# Altium PCB MODULIQ_RF_Detector.PcbDoc (part 2 of 2)
Units mm, origin at the board's own origin, x right, y up, seen from the top; angles counter-clockwise.
Board outline 24 x 76.5 mm, 4 copper layers (L1, P2, L3, L4), stack 1.512 mm thick; 99 components, 100 nets, 366 pads, 199 vias.
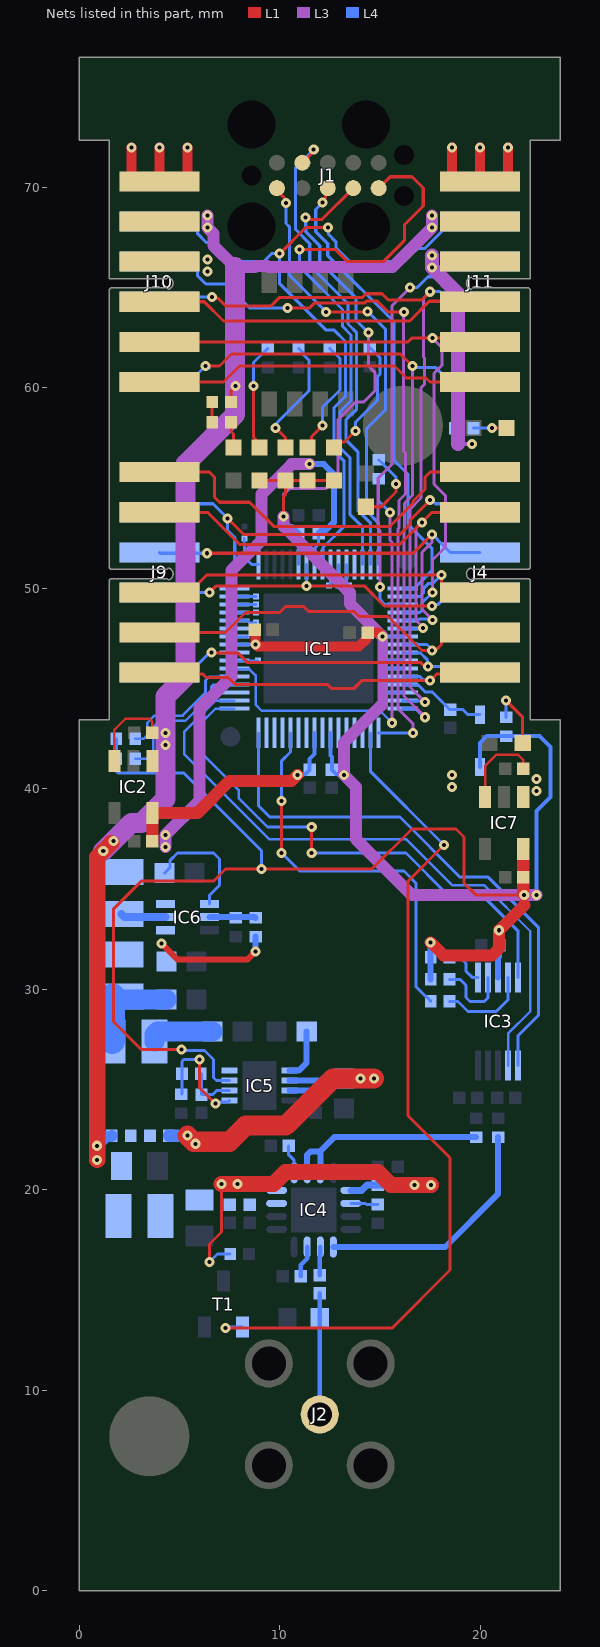
[diagram p4: the nets of this part, all layers, seen from the top]

## Via types
v1: diameter 0.5, hole 0.2, L1 to L4, tented both sides, 188 vias
v2: diameter 0.5, hole 0.2, L1 to L4, 11 vias

## Nets (pads, with @x,y where several pads share a name; then routed paths per layer and width w, separated by ;. In a path a pad name is that pad's centre, name@x,y a point inside that pad or via, vN(x,y) a via of type N, cw(c..) or ccw(c..) an arc to the next point about the centre after c; other vN are vias at no path point) (continued)
HSPI_AD0: IC1.22 J4.8 J9.8 | length 23.9
  L1 w0.15: J9.8@4,53.8 6.4,53.8 8,52.2 16,52.2 17.6,53.8 J4.8@20,53.8
  L3 w0.15: v1(17.1,53.3) 16.8,53 16.8,48.409 17.155,48.054 v1(17.155,48.018)
  L4 w0.15: IC1.22@16.14,48 16.149,48.009 17.146,48.009 v1(17.155,48.018)
HSPI_AD1: IC1.18 J4.10 J9.10 | length 19.5
  L1 w0.152: J9.10@4,49.8 5.5,49.8 6.377,50.677 v1(18.076,50.677) ; v1@18.075,50.65 18.076,50.649 18.076,50.224 18.5,49.8 J4.10@20,49.8
  L4 w0.152: IC1.18@16.14,49.6 16.998,49.6 17.17,49.772 17.17,49.988 17.435,50.253 17.651,50.253 v1@18.075,50.677
HSPI_AD2: IC1.28 J4.12 J9.12 | length 18.1
  L1 w0.152: J9.12@4,45.8 4.07,45.73 6.163,45.73 6.346,45.547 7.447,45.547 7.794,45.2 12.4,45.2 12.6,45 13.7,45 14.1,45.4 v1(17.5,45.4) 17.83,45.73 19.93,45.73 J4.12@20,45.8
  L4 w0.152: IC1.28@16.14,45.6 17,45.6 17.164,45.436 17.464,45.436 v1(17.5,45.4)
HSPI_AD3: IC1.21 J4.3 J9.3 | length 23
  L1 w0.152: v1(6.377,51.755) 16.655,51.755 17.085,52.185 v1(17.6,52.7)
  L3 w0.15: v1(17.6,52.7) 17.6,52.3 17.1,51.8 17.1,48.958 v1(17.625,48.433)
  L4 w0.15: v1(17.6,52.7) 17.62,52.7 17.883,52.437 17.883,52.417 18.5,51.8 J4.3@20,51.8
  L4 w0.152: J9.3@4,51.8 4.045,51.755 v1(6.377,51.755) ; IC1.21@16.14,48.4 16.164,48.424 16.92,48.424 16.967,48.471 17.587,48.471 v1(17.625,48.433)
HSPI_CLK: IC1.7 J4.4 J9.4 | length 16.5
  L1 w0.152: v1(6.494,49.8) 6.517,49.8 6.844,50.127 v1(11.334,50.127) 14.22,50.127 15.224,49.123 v1(17.6,49.123)
  L4 w0.152: J9.4@4,49.8 v1(6.494,49.8) ; v1(11.334,50.127) 11.337,50.13 11.337,51.197 IC1.7@11.34,51.2 ; v1(17.6,49.123) 17.667,49.19 17.89,49.19 18.5,49.8 J4.4@18.624,49.8
HSPI_CS0: IC1.25 J4.6 J9.6 | length 18.6
  L1 w0.152: v1(6.6,46.8) 6.627,46.773 7.93,46.773 8.404,46.3 17.037,46.3 17.17,46.167 17.333,46.167 v1(17.4,46.1)
  L4 w0.152: J9.6@4,45.8 5.5,45.8 6.433,46.733 6.533,46.733 v1(6.6,46.8) ; IC1.25@16.14,46.8 16.164,46.776 17.024,46.776 17.364,46.436 17.364,46.261 17.393,46.232 v1@17.4,46.232 ; v1@17.437,46.232 v1@17.4,46.232 ; J4.6@20,45.8 18.5,45.8 18.2,46.1 v1(17.4,46.1) v1@17.4,46.232
HSPI_ID: IC1.64 J4.2 J9.2 | length 21.5
  L1 w0.152: v1(7.4,53.5) 8.2,52.7 16,52.7 16.5,53.2 16.5,53.4 v1(17.5,54.4)
  L4 w0.152: J9.2@4,53.8 4.424,54.224 6.676,54.224 v1(7.4,53.5) 7.4,52.9 7.759,52.541 7.759,50.024 7.74,50.005 IC1.64@7.74,50 ; v1(17.5,54.4) 17.594,54.4 17.77,54.224 19.576,54.224 J4.2@20,53.8
HSPI_Q: IC1.24 J4.11 J9.11 | length 19.5
  L1 w0.152: J9.11@4,47.8 7.295,47.8 8.295,48.8 10,48.8 10.3,49.1 11.2,49.1 11.447,48.853 13.715,48.853 13.968,48.6 15.4,48.6 17.1,46.9 v1(17.6,46.9) 17.667,46.967 17.837,46.967 18.076,47.206 18.076,47.376 18.5,47.8 J4.11@20,47.8
  L4 w0.152: IC1.24@16.14,47.2 17.349,47.2 17.6,46.949 v1(17.6,46.9)
HSPI_sAD0: IC1.31 J10.10 J11.10 | length 39.4
  L1 w0.15: v1(6.632,64.545) 6.699,64.478 6.922,64.478 7.3,64.1 9.577,64.1 10,64.523 14.134,64.523 14.311,64.7 15.1,64.7 15.4,64.4 17.1,64.4 v1(17.5,64.8)
  L3 w0.15: v1(17.26,44.325) 16.5,45.085 16.5,52.774 16.508,52.782 16.508,53.968 17.048,54.507 17.048,60.009 17.223,60.184 17.223,61.489 17.171,61.541 17.171,64.471 v1(17.5,64.8)
  L4 w0.15: J10.10@4,64.3 4.245,64.545 v1(6.632,64.545) ; IC1.31@16.14,44.4 16.151,44.389 17.196,44.389 v1(17.26,44.325) ; v1(17.5,64.8) 18,64.8 18.5,64.3 J11.10@20,64.3
HSPI_sAD1: IC1.32 J10.12 J11.12 | length 36.8
  L1 w0.15: v1(6.3,61.1) 7,61.1 7.6,61.7 16.021,61.7 v1(16.621,61.1)
  L3 w0.152: v1(16.621,61.1) 16.621,54.635 16.23,54.244 16.23,52.898 16.2,52.867 16.2,44.635 v1(17.26,43.575)
  L4 w0.15: J10.12@4,60.3 5.5,60.3 v1(6.3,61.1) ; v1(16.621,61.1) 16.688,61.033 17.767,61.033 18.5,60.3 J11.12@20,60.3
  L4 w0.152: v1(6.3,61.1) 6.394,61.1 v1@6.494,61 ; IC1.32@16.14,44 16.79,44 17.215,43.575 v1(17.26,43.575)
IO0: IC1.34 T1.1 | length 43.2
  L1 w0.15: v1(7.3,13.1) 15.6,13.1 18.5,16 18.5,21.6 16.4,23.7 16.4,35.4 v1(18.2,37.2)
  L4 w0.15: v1(7.3,13.1) 7.35,13.15 T1.1@8.15,13.15 ; IC1.34@14.54,42.8 14.54,40.86 v1(18.2,37.2)
IO1: IC1.35
IO2: IC1.36
IO3: IC1.37
IO4: IC1.38
IO5: IC1.40
IO6: IC1.42
IO7: IC1.43
MODBUS_A: J10.4 J11.4 | length 16.8
  L1 w0.152: J10.4@4,64.3 6.236,64.3 7.195,63.341 16.482,63.341 17.467,64.326 19.974,64.326 J11.4@20,64.3
MODBUS_B: J10.6 J11.6 | length 16.7
  L1 w0.152: J10.6@4,60.3 7.2,60.3 8,61.1 15.725,61.1 16.325,60.5 17.3,60.5 17.5,60.3 J11.6@20,60.3
NetC12_1: C12.1 J2.1 R10.2 | length 6.9
  L4 w0.23: J2.1@12,8 R10.2@12,13.6 C12.1@12,14.85
NetC12_2: C12.2 IC4.14 | length 1.4
  L4 w0.23: C12.2@12,15.75 12,16.743 12.025,16.768 IC4.14@12.025,17.15
NetC13_2: C13.2 IC4.15 | length 1.6
  L4 w0.23: C13.2@11.05,15.7 11.05,16.25 11.375,16.575 IC4.15@11.375,17.15
NetC15_2: C15.2 IC4.5 | length 1.5
  L4 w0.15: C15.2@10.45,22.2 10.45,21.75 10.725,21.475 IC4.5@10.725,20.85
NetC16_2: C16.2 L1.1 R15.1 R16.1
NetC25_2: C25.2 IC6.4 L2.1 R11.2 | length 5.9
  L1 w0.3: v1(4.1,32.3) 4.9,31.5 8.4,31.5 v1(8.8,31.9)
  L4 w0.3: v1(8.8,31.9) R11.2@8.8,32.63
NetC26_2: C26.2 L2.2 L4.1 | length 5
  L4 w1: L2.2@1.665,29.65 1.815,29.5 C26.2@4.35,29.5
  L4 w1.27: L4.1@1.65,27.4 1.65,29.635 L2.2@1.665,29.65
NetC27_2: C27.2 IC5.6 R12.2 | length 2.5
  L4 w0.15: R12.2@6.07,25.8 6.1,25.77 C27.2@6.1,24.75 6.65,24.75 6.85,24.95 IC5.6@7.5,24.95
NetC28_2: C28.2 IC5.3 | length 1.4
  L4 w0.3: IC5.3@10.5,24.95 11.6,24.95 C28.2@11.8,24.75
NetC29_2: C29.2 IC5.1 | length 2.6
  L4 w0.3: IC5.1@10.5,25.95 10.95,25.95 11.35,26.35 C29.2@11.35,27.9
NetIC3_6: IC3.6 R8.2 | length 2.1
  L4 w0.15: R8.2@18.47,31.6 19,31.6 19.3,31.3 19.3,30.9 19.6,30.6 IC3.6@19.9,30.6
NetIC3_7: IC3.7 R9.2 | length 3.8
  L4 w0.15: R9.2@18.47,30.5 19,30.5 19.3,30.2 19.3,29.6 19.5,29.4 20.2,29.4 20.4,29.6 IC3.7@20.4,30.6
NetIC3_9: IC3.9 R5.1 | length 4.5
  L4 w0.15: R5.1@18.47,29.4 18.9,29.4 19.4,28.9 20.8,28.9 21.4,29.5 IC3.9@21.4,30.6
NetIC5_5: IC5.5 R12.1 R14.2 | length 5.9
  L1 w0.15: v1(6,26.5) 6,25.1 v1(6.8,24.3)
  L4 w0.15: R14.2@5.1,24.77 5.13,24.8 R12.1@5.13,25.82 ; R12.1@5.13,25.8 5.13,26.412 5.218,26.5 v1(6,26.5) ; v1(6.8,24.3) 6.895,24.3 6.979,24.385 7.435,24.385 IC5.5@7.5,24.45
NetIC6_2: IC6.2 R11.1 R13.2 | length 2.3
  L4 w0.3: IC6.2@6.5,33.6 8.77,33.6 R11.1@8.8,33.57
NetIC6_5: IC6.5 L3.2 | length 2.3
  L4 w0.4: L3.2@2.1,33.75 2.25,33.6 IC6.5@4.3,33.6
NetLD1_2: LD1.2 R1.1 | length 3.8
  L1 w0.15: LD1.2@14.3,54.075 15.062,54.075 15.8,54.813 v1(15.8,55.2)
  L4 w0.15: R1.1@14.94,56.411 14.96,56.411 15.175,56.196 15.175,56.176 15.8,55.551 v1(15.8,55.2)
NetLD18_1: LD18.1 R26.1 | length 6.3
  L1 w0.15: LD18.1@12.7,57.025 12.983,57.308 13.235,57.308 v1(13.776,57.85)
  L4 w0.15: v1(13.776,57.85) 13.776,58.276 14.873,59.373 14.873,60.558 15.003,60.688 15.003,61.435 15.003,61.51 14.511,62.002 R26.1@14.491,62.002
NetLD19_1: LD19.1 R27.1 | length 5.8
  L1 w0.15: LD19.1@11.4,57.025 11.586,57.211 11.586,57.562 v1(12.14,58.116)
  L4 w0.15: v1(12.14,58.116) 12.14,59.04 13.004,59.904 13.004,60.645 13.005,60.646 13.005,61.468 12.513,61.96 R27.1@12.493,61.96
NetLD20_1: LD20.1 R32.1 | length 6.1
  L1 w0.15: v1(9.8,58) 10.3,57.5 LD20.1@10.3,57.025
  L4 w0.15: v1(9.8,58) 9.867,58.067 9.867,58.267 11.474,59.874 11.474,61.371 11.175,61.67 11.175,61.745 10.96,61.96 R32.1@10.94,61.96
NetLD21_1: LD21.1 R33.1 | length 5.4
  L1 w0.15: v1(8.7,60.1) 8.69,60.09 8.69,57.535 LD21.1@9.18,57.045
  L4 w0.15: v1(8.7,60.1) 8.7,61.266 9.394,61.96 R33.1@9.414,61.96
NetLD26_2: LD26.2 R46.1 | length 3.3
  L1 w0.15: v1(21.3,44.4) 22.125,43.575 LD26.2@22.125,42.3
  L4 w0.15: R46.1@21.3,43.57 v1(21.3,44.4)
NetLD27_2: LD27.2 R48.1 | length 1.3
  L1 w0.15: R48.1@7.57,58.3 7.57,57.83 7.7,57.7 LD27.2@7.7,57.025
NetLD28_2: LD28.2 R2.2 | length 1.7
  L1 w0.15: v1(20.6,58) LD28.2@21.325,58
  L4 w0.15: R2.2@19.67,58 v1(20.6,58)
NetR47_1: R47.1 R48.2 | length 1
  L1 w0.15: R48.2@6.63,58.3 R47.1@6.63,59.3
P1V8: C5.2 C9.2 C232.2 IC1.8 IC1.41 IC2.5 | length 41.1
  L1 w0.6: C9.2@3.65,37.4 IC2.5@3.65,38.8 5.9,38.8 7.5,40.4 10.6,40.4 v1(10.9,40.7)
  L3 w0.6: v1(4.3,37.1) v1(4.3,37.7) 6,39.4 6,44 7.6,45.6 7.6,50.9 9.1,52.4 9.1,54.7 10.6,56.2 v1(11.5,56.2)
  L4 w0.152: IC1.8@11.74,51.2 11.764,51.224 11.764,52.035 11.94,52.211 C5.2@11.94,52.75
  L4 w0.2: v1(10.9,40.7) 11.173,40.7 11.213,40.74 11.29,40.74 C232.2@11.5,40.95 11.5,41.5 11.74,41.74 IC1.41@11.74,42.8
  L4 w0.3: v1(11.5,56.2) 12.2,56.2 12.7,55.7 12.7,53.3 12.31,52.91 12.1,52.91 C5.2@11.94,52.75
P3V3: C1.2 C2.2 C3.2 C4.2 C7.2 C14.2 D1.1 IC1.6 IC1.23 IC1.39 IC1.57 IC3.8 IC5.7 IC7.5 J1.4 LD18.2 LD19.2 LD20.2 LD21.2 R8.1 R9.1 R17.1 R18.1 R46.2 | length 147.5
  L1 w0.15: v1(5.1,27) 3.1,27 1.7,28.4 1.7,34 3.1,35.4 6.7,35.4 7.3,36 v2(9.1,36) 14.6,36 16.6,38 18.8,38 19.2,37.6 19.2,35.3 19.8,34.7 v1(22.2,34.7) ; LD21.2@9,55.375 LD20.2@10.3,55.375 LD19.2@11.4,55.375 LD18.2@12.7,55.375 ; v1(10.2,53.6) 10.2,54.6 10.3,54.7 LD20.2@10.3,55.395
  L1 w0.152: v1(11.3,68.5) 11.367,68.433 11.53,68.433 11.563,68.4 12.105,68.4 J1.4@13.67,69.965
  L1 w0.5: C3.2@14.393,47.8 14.94,47.8 v1(15.14,47.6)
  L1 w0.508: C1.2@8.762,47.947 8.792,47.916 v1(8.792,47.206) 8.889,47.109 13.96,47.109 14.337,47.485 C3.2@14.337,47.744
  L1 w0.6: v1(17.53,32.35) 18.18,31.7 20.599,31.7 20.95,32.051 v1(20.95,32.95) 22.2,34.2 ; IC7.5@22.15,37 22.15,34.75 v1(22.2,34.7)
  L3 w0.15: v1(10.2,53.6) 10.2,54.7 10.48,54.98 12.28,54.98 12.9,55.6 12.9,58.4 13.8,59.3 14.2,59.3 14.747,59.847 14.747,60.778 14.43,61.095
  L3 w0.152: 14.43,61.095 v1(14.43,62.761)
  L3 w0.516: 15.098,44.198 15.14,44.24 v1(15.14,47.6)
  L3 w0.6: v1(10.2,53.6) 10.2,53.1 13.5,49.8 13.5,49.24 v1@15.098,47.642 ; 15.098,44.198 13.2,42.3 v1(13.2,40.7) 13.8,40.1 13.8,37.5 16.6,34.7 v1(22.2,34.7) v1(22.8,34.7)
  L4 w0.15: R17.1@1.85,42.5 R18.1@1.85,41.5 1.85,40.888 1.938,40.8 5.2,40.8 9.1,36.9 v2(9.1,36) ; v1(5.1,27) 5.148,26.952 6.248,26.952 6.7,26.5 6.7,25.6 6.85,25.45 IC5.7@7.5,25.45 ; IC1.57@7.74,47.2 7.743,47.203 8.79,47.203 v1(8.792,47.206) ; IC1.6@10.94,51.2 C4.2@10.94,52.75 ; v1(15.14,47.6) IC1.23@16.14,47.6
  L4 w0.152: v1(11.3,68.5) 11.3,67.8 12,67.1 12,66.3 13.8,64.5 13.8,63.392 v1(14.43,62.761)
  L4 w0.2: IC1.39@12.54,42.8 12.54,41.66 12.6,41.6 C2.2@12.6,40.95 12.81,40.74 C2.2@12.887,40.74 ; 12.927,40.7 v1(13.2,40.7) ; D1.1@20,41.1 20,42.3 20.33,42.63 R46.2@21.3,42.63 22.97,42.63 23.5,42.1 23.5,39.6 22.8,38.9 v1(22.8,34.7)
  L4 w0.3: v1(10.2,53.6) 10.2,53.378 10.515,53.063 10.627,53.063 C4.2@10.94,52.75 ; R9.1@17.53,30.5 R8.1@17.53,31.6 v1(17.53,32.35) ; IC3.8@20.9,30.6 20.9,31.6 20.95,31.65 C14.2@20.95,32.2 v1(20.95,32.95)
P5V0: C8.2 C24.2 C231.2 IC2.1 IC2.3 IC6.1 IC6.6 IC7.1 IC7.3 J10.2 J11.2 L3.1 R15.2 R47.2 | length 79.7
  L1 w0.127: IC2.3@1.75,41.4 1.75,42.95 2.3,43.5 3.5,43.5 3.65,43.35 C8.2@3.65,42.8 ; IC7.3@20.25,39.6 20.25,41.15 20.8,41.7 21.9,41.7 22.15,41.45 C231.2@22.15,41
  L1 w0.15: R47.2@7.57,59.3 7.57,59.837 7.8,60.067 v1(7.8,60.1)
  L1 w0.8: v1(0.9,21.5) v1(0.9,22.2) 0.9,36.6 v1(1.2,36.9) v1@1.6,37.3
  L3 w0.6: v1(6.4,68.6) v1(6.4,68) 6.692,67.708 6.692,67.108 7.777,66.023 8.766,66.023 8.82,66.077 9.38,66.077 9.434,66.023 15.623,66.023 v1(17.6,68) v1(17.6,68.6)
  L3 w1: v1(1.2,36.9) v1(1.7,37.4) 2.6,38.3 3.1,38.3 4.3,39.5 v1(4.3,42.2) v1(4.3,42.8) 4.3,44.6 5.3,45.6 5.3,56.2 7.777,58.677 7.777,66.023
  L4 w0.15: C24.2@4.25,35.8 4.537,36.087 4.537,36.437 4.9,36.8 6.7,36.8 7,36.5 7,35.2 6.5,34.7 IC6.1@6.5,34.25
  L4 w0.55: v1(0.9,21.5) v1(0.9,22.2) 1.365,22.665 1.615,22.665 1.63,22.68 R15.2@1.63,22.7
  other v1: 22.8,39.9 18.6,40.1 22.8,40.5 18.6,40.7
P5V0_FLT: C17.2 C18.2 C19.2 C20.2 C21.2 IC4.3 IC4.4 IC4.9 L1.2 R3.2 | length 20.4
  L1 w0.15: v1(6.5,16.4) 6.5,17.3 7.1,17.9 v1(7.1,20.3)
  L1 w0.8: v1(7.1,20.3) v1(7.9,20.3) 9.7,20.3 10.3,20.9 14.9,20.9 15.55,20.25 v1(16.725,20.25) v1(17.55,20.25)
  L4 w0.15: v1(6.5,16.4) 6.9,16.8 R3.2@7.53,16.8
  L4 w0.35: IC4.9@13.55,19.975 14.075,19.975 14.35,20.25 C20.2@14.9,20.25 C21.2@15.9,20.25
  L4 w0.6: C21.2@15.9,20.25 v1(16.725,20.25) v1(17.55,20.25)
P5V0A: C23.2 IC5.2 R16.2 | length 16.5
  L1 w1: v1(5.4,22.7) 5.7,22.4 7.5,22.4 8.3,23.2 10.3,23.2 12.65,25.55 v1(14.025,25.55) v1(14.7,25.55)
  L4 w0.3: IC5.2@10.5,25.45 12.05,25.45 12.15,25.55 C23.2@13.2,25.55
  L4 w0.6: R16.2@4.47,22.7 v1(5.4,22.7) v1(5.8,22.3) ; C23.2@13.2,25.55 v1(14.025,25.55) v1(14.7,25.55)
P6V0A: C22.2 IC5.8 L4.2 | length 3.3
  L4 w1: L4.2@3.75,27.4 3.75,27.75 3.9,27.9 C22.2@6.65,27.9
P12V0: J10.1 J10.3 J11.1 J11.3 R2.1 | length 22.4
  L1 w0.5: J10.1@2.6,70.3 v1(2.6,72) ; J10.1@4,70.3 v1(4,72) ; J10.1@5.4,70.3 v1(5.4,72) ; J11.1@18.6,70.3 v1(18.6,72) ; J11.1@20,70.3 v1(20,72) ; J11.1@21.4,70.3 v1(21.4,72)
  L3 w0.15: 18.9,57.2 v1(19.6,57.2)
  L3 w0.7: v1(17.6,66.6) v1(17.6,66) 18.9,64.7 18.9,57.2
  L4 w0.15: R2.1@18.73,58 18.73,57.47 19,57.2 v1(19.6,57.2)
  other v1: 6.4,65.8 6.4,66.4
PROJECT_ID0: IC1.55 NT14.1 | length 1.2
  L4 w0.127: IC1.55@7.74,46.4 NT14.1@8.914,46.4
PROJECT_ID1: IC1.56
PROJECT_ID2: IC1.58 NT13.1 | length 1.3
  L4 w0.127: IC1.58@7.74,47.6 8.39,47.6 8.5,47.71 8.569,47.71 8.659,47.8 NT13.1@8.914,47.8
PROJECT_ID3: IC1.59
PROJECT_ID4: IC1.60 NT8.1 | length 1.1
  L4 w0.127: IC1.60@7.74,48.4 8.39,48.4 8.49,48.3 NT8.1@8.814,48.3
PROJECT_ID5: IC1.61 NT9.1 | length 1.1
  L4 w0.15: IC1.61@7.74,48.8 NT9.1@8.814,48.8
PROJECT_ID6: IC1.62 NT10.1 | length 1.1
  L4 w0.15: IC1.62@7.74,49.2 NT10.1@8.814,49.2
PROJECT_ID7: IC1.63 NT11.1 | length 1.1
  L4 w0.15: IC1.63@7.74,49.6 NT11.1@8.814,49.6
RESETn_I: IC1.33 J10.9 | length 36.9
  L1 w0.15: v1(10.4,64) 11.5,64 11.746,64.246 14.248,64.246 14.329,64.326 14.874,64.326 15.4,63.8 v1(16.2,63.8)
  L3 w0.15: v1(16.2,63.8) 16.169,63.769 16.169,56.877 16.277,56.77 16.277,54.717 15.952,54.392 15.952,53.013 15.9,52.961 15.9,44 16.657,43.243 v1(16.657,42.8)
  L4 w0.15: J10.9@4,66.3 5.484,66.3 5.909,65.875 5.909,65.591 6.317,65.183 7.317,65.183 8.5,64 v1(10.4,64) ; IC1.33@14.94,42.8 v1(16.657,42.8)
RESETn_O: IC1.19 J11.9 | length 20.1
  L3 w0.15: v1(15.013,50.073) 15.007,50.079 15.007,52.88 14.9,52.987 14.9,55.5 15.6,56.2 15.6,64.1 v1(16.5,65)
  L4 w0.15: v1(15.013,50.073) 15.013,49.44 15.176,49.276 15.253,49.2 IC1.19@16.14,49.2 ; v1(16.5,65) 16.503,65.003 16.855,65.003 17.4,65.548 17.748,65.548 17.787,65.548 18.075,65.836 18.075,65.875 J11.9@18.5,66.3
REV_ID0: IC1.1 NT1.1 | length 1.8
  L4 w0.127: 8.24,52.147 NT1.1@8.24,52.5
  L4 w0.152: 8.24,52.147 8.24,51.56 8.6,51.2 IC1.1@8.94,51.2
REV_ID1: IC1.10 NT2.1 | length 0.4
  L4 w0.15: NT2.1@12.453,50.148 12.528,50.223 12.528,50.488 IC1.10@12.54,50.5
REV_ID2: IC1.11 NT3.1 | length 1.1
  L4 w0.15: NT3.1@12.94,50.148 IC1.11@12.94,51.2
REV_ID3: IC1.12 NT4.1 | length 0.9
  L4 w0.15: IC1.12@13.34,51.2 13.34,50.318 NT4.1@13.388,50.27
REV_ID4: IC1.13
REV_ID5: IC1.26 NT5.1 | length 1
  L4 w0.152: NT5.1@15.14,46.4 IC1.26@16.14,46.4
REV_ID6: IC1.27 NT6.1 | length 1
  L4 w0.152: NT6.1@15.14,46 IC1.27@16.14,46
REV_ID7: IC1.30 NT7.1 | length 1
  L4 w0.152: NT7.1@15.14,44.8 IC1.30@16.14,44.8
RSTn: C6.2 D1.2 IC1.29 | length 4.5
  L4 w0.15: 17.975,44.475 18.265,44.185 C6.2@18.5,43.95 19.15,43.95 19.4,43.7 D1.2@20,43.7
  L4 w0.152: IC1.29@16.14,45.2 16.164,45.176 16.924,45.176 17.263,44.837 17.613,44.837 17.975,44.475
SCL: IC1.9 J10.8 J11.8 | length 37.6
  L1 w0.152: v1(10,66.7) 11.3,68 v1(12.4,68)
  L4 w0.152: J10.8@4,68.3 5.485,68.3 5.909,67.876 5.909,67.691 6.354,67.246 6.65,67.246 7.597,66.3 9.197,66.3 9.597,66.7 v1(10,66.7) 10,65.2 12.3,62.9 12.7,62.9 13.283,62.317 13.283,60.531 13.283,60.53 13.283,59.583 12.7,59 12.7,56.873 13.2,56.373 13.2,53.076 12.164,52.04 12.164,51.224 IC1.9@12.14,51.2 ; v1(12.4,68) 12.434,67.966 12.434,67.662 12.8,67.295 12.8,67 13.5,66.3 16.2,66.3 16.863,66.963 17.248,66.963 18.076,67.792 18.076,67.876 18.5,68.3 J11.8@20,68.3
SDA: IC1.20 J10.5 J11.5 | length 31.8
  L1 w0.152: J10.5@4,62.3 16.4,62.3 16.587,62.487 v1(17.623,62.487) ; v1@17.661,62.449 17.7,62.487 19.813,62.487 J11.5@20,62.3
  L3 w0.152: v1(17.623,49.8) 17.623,51.423 18.269,52.069 18.269,54.631 17.7,55.2 17.7,60.731 18.1,61.131 18.1,62.01 v1(17.623,62.487)
  L4 w0.152: IC1.20@16.14,48.8 16.999,48.8 17.093,48.894 17.093,49.27 v1(17.623,49.8)
SPI_CLK: IC1.48 IC3.1 | length 27.4
  L4 w0.15: IC1.48@8.94,42.8 8.94,39.16 9.5,38.6 16,38.6 19,35.6 20.4,35.6 22.9,33.1 22.9,28.7 21.9,27.7 IC3.1@21.9,26.2
SPI_CS0: IC1.50 IC3.2 | length 32.3
  L4 w0.127: IC1.50@7.74,44.4 6.8,44.4 5.23,42.83 5.23,41.745 7.275,39.7 9.475,37.5 16.3,37.5 18.6,35.2 20.2,35.2 22.5,32.9 22.5,28.9 21.4,27.8 IC3.2@21.4,26.2
SPI_CS1: IC1.51
SPI_CS2: IC1.52 R18.2 | length 7.5
  L4 w0.127: R18.2@2.79,41.5 3.4,41.5 3.7,41.8 3.7,43.1 4,43.4 5.3,43.4 6.6,44.7 6.6,45.1 6.7,45.2 IC1.52@7.74,45.2
SPI_CS3: IC1.53 R17.2 | length 6.9
  L4 w0.127: R17.2@2.79,42.5 3.2,42.5 3.4,42.7 3.4,43.3 3.754,43.654 5.154,43.654 6.3,44.8 6.3,45.4 6.5,45.6 IC1.53@7.74,45.6
SPI_MISO: IC1.44 R5.2 | length 19.7
  L1 w0.15: v1(10.1,36.8) v1(10.1,39.4)
  L4 w0.15: v1(10.1,36.8) 11,35.9 16.2,35.9 16.8,35.3 16.8,30.13 17.295,29.635 17.315,29.635 17.53,29.42 R5.2@17.53,29.4 ; v1(10.1,39.4) 10.1,41.4 10.54,41.84 IC1.44@10.54,42.8
SPI_MISO1: IC1.45
SPI_MISO2: IC1.46
SPI_MISO3: IC1.47
SPI_MOSI: IC1.49 IC3.10 | length 26.2
  L1 w0.15: v1(11.6,36.8) v1(11.6,38.1)
  L4 w0.127: IC1.49@7.74,44 6.8,44 6.08,43.28 6.08,41.82 7.95,39.95 7.95,39.55 9.4,38.1 v1(11.6,38.1)
  L4 w0.15: v1(11.6,36.8) 16.3,36.8 18.4,34.7 20.1,34.7 21.9,32.9 IC3.10@21.9,30.6
STAT_LED: IC1.54 R1.2 | length 22.3
  L3 w0.15: v1(15.5,53.8) 15.5,52.4 15.6,52.3 v1(15.6,43.3)
  L4 w0.127: IC1.54@7.74,46 7.777,45.963 8.496,45.963 8.8,45.659 8.8,44.2 9.1,43.9 15,43.9 v1(15.6,43.3)
  L4 w0.15: R1.2@14.94,55.471 14.94,54.36 v1(15.5,53.8)
TADJ: IC4.10 R7.2 | length 1.4
  L4 w0.15: IC4.10@13.55,19.325 14.275,19.325 14.33,19.27 R7.2@14.9,19.27
TCK: IC1.16 J1.1 | length 22.9
  L1 w0.152: J1.1@9.86,69.965 9.86,69.858 10.251,69.467 10.251,69.283 v1(10.317,69.216) ; v1(12.317,63.794) 14.367,63.794 v1(14.39,63.817)
  L4 w0.152: v1(10.317,69.216) 10.317,68.2 10.5,68.017 10.5,65.611 v1(12.317,63.794) ; v1(14.39,63.817) 15.281,62.926 15.281,58.912 14.33,57.961 14.33,53.86 14.94,53.25 IC1.16@14.94,51.2
TDI: IC1.15 J1.9 | length 24
  L1 w0.152: J1.9@11.13,71.235 11.633,71.739 11.633,71.833 v1(11.7,71.9)
  L4 w0.152: v1(11.7,71.9) 10.8,71 10.8,67.9 11.5,67.2 11.5,66.112 13.412,64.2 13.412,63.191 13.842,62.761 13.842,60.299 13.841,60.298 13.841,58.941 13.3,58.4 13.3,57.412 13.9,56.812 13.9,53.895 14.54,53.255 IC1.15@14.54,51.2
TDO: IC1.17 J1.3 | length 23.6
  L1 w0.152: v1(12.145,69.246) 12.145,69.34 12.276,69.472 12.276,69.841 J1.3@12.4,69.965
  L4 w0.152: v1(12.145,69.246) 11.8,68.901 11.8,67.8 12.4,67.2 12.4,66.6 15.7,63.3 15.7,56.4 16.4,55.7 16.4,53.2 17.593,52.007 17.593,50.881 16.814,50.102 16.814,50.024 16.79,50 IC1.17@16.14,50
TEMP: IC4.13 R4.1 | length 12.2
  L4 w0.3: IC4.13@12.675,17.15 18.25,17.15 20.9,19.8 R4.1@20.9,22.63
TMS: IC1.14 J1.5 | length 29.1
  L1 w0.152: v1(11,66.9) 12.8,66.9 13.4,66.3 15.169,66.3 16.219,67.35 16.219,68.13 17.163,69.075 17.163,69.979 16.605,70.537 15.512,70.537 J1.5@14.94,69.965
  L4 w0.152: v1(11,66.9) 11,66.043 13.133,63.91 13.133,63.076 13.563,62.646 13.563,60.415 13.562,60.414 13.562,59.362 13,58.8 13,57.033 13.5,56.533 13.5,53.7 14.14,53.06 IC1.14@14.14,51.2
TRG: J4.7 J9.7 | length 19.2
  L1 w0.152: J9.7@4,55.8 6.5,55.8 6.75,55.55 6.75,54.55 7,54.3 8.5,54.3 9.7,53.1 15.5,53.1 16.65,54.25 16.65,54.35 17.25,54.95 17.25,55.55 17.5,55.8 J4.7@20,55.8
VOUT: IC4.6 IC4.7 R6.1 | length 10.8
  L4 w0.3: IC4.6@11.375,20.85 11.375,21.749 11.551,21.925 12.025,21.925 ; IC4.7@12.025,20.85 12.025,21.925 ; R6.1@19.8,22.63 12.73,22.63 12.025,21.925
pads on no net: IC1.FTG1 IC1.FTG2 IC2.4 IC7.4 J1.6 J1.7 J1.8 J1.Mech

## Polygon pours and split planes (outlines as drawn)
GND on L3 "GND_L03_P028" (solid, remove dead copper, pour order 28): 22.5,60.3 22.5,60.8 22.5,72.9 24,72.9 24,73.4 24,76.5 0,76.5 0,73.4 0,72.9 1.5,72.9 1.5,55.8 1.5,43.2 0.2,43.2 0.2,0.2 23.8,0.2 23.8,43.2 22.5,43.2 22.5,55.8
P12V0 on L3 "P12V0_L03_P019" (solid, pour order 19): 6.32,66.88 5.9,67.3 5.9,70.8 6.6,71.5 7.3,72.2 16.7,72.2 17.4,71.5 18.2,70.7 18.2,67.7 17.3,66.8 17.3,65.8 17.4,65.7 17.9,65.7 18,65.8 20.6,65.8 21.9,67.1 21.9,74.5 20.2,76.2 3.7,76.2 2.1,74.6 2.1,67.1 3.4,65.8 5,65.8 5.3,65.5 6.6,65.5 6.723,65.623 6.723,66.477
P6V0A on L4 "P6V0A_L04_P052" (solid, pour order 52): 7.1,25.8 7.1,26.45 6.15,27.4 6.15,28.4 7.15,28.4 7.15,27.4 7.9,26.65 7.9,25.8
GND on L4 "GND_L04_P029" (solid, remove dead copper, pour order 29): 0.245,72.4 2,72.4 2,69.8 6.1,69.8 6.1,59.2 1.971,59.2 1.971,55.3 6.1,55.3 6.1,43.1 0.245,43.1 0.245,0.1 23.845,0.1 23.845,43.1 18.045,43.1 18.045,55.3 22.045,55.3 22.045,59.2 17.871,59.2 17.871,69.8 22,69.8 22,72.4 23.845,72.4 23.845,73.95 23.845,76.2 0.245,76.2
P5V0 on L4 "P5V0_L04_P050" (solid, pour order 50): 0.998,35.202 1,35.204 1,36.5 0.9,36.6 0.9,37.3 1.4,37.8 1.6,37.8 2.2,37.8 2.7,37.3 2.7,36.9 3.1,36.5 4.55,36.5 4.75,36.3 4.75,34.475 4.775,34.45 4.775,34.05 3.825,34.05 3.825,34.45 3.075,35.2 1,35.2
NetIC6_5 on L4 "NETIC6_5_L04_P049" (solid, pour order 49): 4.775,33.4 3.5,33.4 3.2,33.1 1,33.1 1,34.4 3.2,34.4 3.2,34.2 3.6,33.8 4.775,33.8
GND on L4 "GND_L04_P048" (solid, pour order 48): 5.35,31.9 5,32.25 5,35.05 5.25,35.3 5.25,36.3 6.25,36.3 6.25,35.15 5.8,34.7 5.8,33.375 6.025,33.15 6.975,33.15 7.205,32.92 8.11,32.92 8.11,31.71 7.3,30.9 5.35,30.9
NetC25_2 on L4 "NETC25_2_L04_P047" (solid, pour order 47): 1,31.1 1.2,30.9 4.85,30.9 4.85,31.9 4.775,31.975 4.775,33.15 3.825,33.15 3.825,33.025 3.2,32.4 1,32.4
GND on L4 "GND_L04_P045" (solid, pour order 45): 5.03,23.3 9.9,23.3 10.1,23.1 13.25,23.1 13.7,23.55 13.7,24.55 12.7,24.55 12.31,24.16 11.34,24.16 10.9,24.6 10.1,24.6 9.85,24.85 9.85,26.42 10.35,26.92 10.35,28.4 7.65,28.4 7.65,27.4 8.15,26.9 8.15,23.98 7.97,23.8 6.77,23.8 6.41,24.16 4.83,24.16 4.79,24.12 4.79,23.54
GND on L4 "GND_L04_P044" (solid, pour order 44): 3.375,20.5 5,20.5 5.2,20.7 5.2,21.7 5,21.9 3.375,21.9
NetC16_2 on L4 "NETC16_2_L04_P043" (solid, pour order 43): 1.6,21.9 1.6,20.5 0.9,19.8 0.9,17.8 1.1,17.6 2.6,17.6 2.6,19.8 3,20.2 3,22.15 3.24,22.39 3.82,22.39 3.82,23.01 2.28,23.01 2.28,22.08 2.1,21.9
P5V0_FLT on L4 "P5V0_FLT_L04_P042" (solid, pour order 42): 10.2,20.15 9.45,20.15 8.9,20.7 5.975,20.7 5.3,20.025 3.625,20.025 3.4,19.8 3.4,17.6 4.7,17.6 4.7,18.375 5.3,18.975 6.7,18.975 6.735,18.94 8.81,18.94 9.02,19.15 10.2,19.15 10.2,19.5 9.3,19.5 9.15,19.65 9.3,19.8 10.2,19.8
GND on L4 "GND_L04_P041" (solid, pour order 41): 5.3,18.225 5.735,18.66 9.06,18.66 9.25,18.85 10.2,18.85 10.2,18.5 9.3,18.5 9.15,18.35 9.3,18.2 10.2,18.2 10.2,17.85 9.45,17.85 9.1,17.5 7.025,17.5 6.7,17.175 5.3,17.175
P5V0 on L4 "P5V0_L04_P027" (solid, pour order 27): 19.2,42.1 19.5,41.8 19.5,40.5 19.6,40.4 20.4,40.4 20.6,40.6 20.6,41.6 20.9,41.9 23,41.9 23.2,41.7 23.2,39.9 22.9,39.6 18.8,39.6 18.1,40.3 18.1,41.8 18.4,42.1
GND on L1 "GND_L01_P030" (solid, remove dead copper, pour order 30): 6.1,44.8 1.521,44.8 1.521,43.2 0.2,43.2 0.2,0.2 23.8,0.2 23.8,43.2 22.5,43.2 22.5,44.8 17.9,44.8 17.9,57.3 22,57.3 22,59.3 17.9,59.3 17.9,72.4 24,72.4 24,73.4 24,76.5 0,76.5 0,73.4 0,72.3 6.1,72.3 6.1,59.3 2,59.3 2,57.3 6.1,57.3
P1V8 on L1 "P1V8_L01_P051" (solid, pour order 51): 3.35,36.95 3.6,36.7 4.4,36.7 4.7,37 4.7,39.1 4.45,39.35 3.35,39.35
P3V3 on L1 "P3V3_L01_P025" (solid, pour order 25): 21.85,37.55 21.85,34.35 22,34.2 23,34.2 23.2,34.4 23.2,37.3 22.95,37.55
P5V0 on L1 "P5V0_L01_P022" (solid, pour order 22): 22,68.8 17.9,68.8 17.8,68.9 17.4,68.9 17.3,68.8 17.3,67.8 17.4,67.7 17.9,67.7 18,67.8 22,67.8
P5V0 on L1 "P5V0_L01_P021" (solid, pour order 21): 2,67.8 6.1,67.8 6.2,67.7 6.6,67.7 6.7,67.8 6.7,68.8 6.6,68.9 6.1,68.9 6,68.8 2,68.8
P12V0 on L1 "P12V0_L01_P020" (solid, pour order 20): 2,69.8 2,74.5 3.4,75.9 20.5,75.9 22,74.4 22,69.8 18,69.8 18,73 16.2,74.8 7.8,74.8 6,73 6,69.8
P12V0 on L1 "P12V0_L01_P018" (solid, pour order 18): 22,66.8 17.9,66.8 17.8,66.9 17.4,66.9 17.3,66.8 17.3,65.8 17.4,65.7 17.9,65.7 18,65.8 22,65.8
P12V0 on L1 "P12V0_L01_P017" (solid, pour order 17): 2,65.8 6.1,65.8 6.2,65.7 6.6,65.7 6.7,65.8 6.7,66.8 6.6,66.9 6.1,66.9 6,66.8 2,66.8
P5V0 on L1 "P5V0_L01_P015" (solid, pour order 15): 4.7,41.1 12.8,41.1 14.8,39.1 19.1,39.1 19.4,39.4 19.4,40.8 19.1,41.1 16,41.1 13.99,43.11 9.69,43.11 3.34,43.11 3.34,40.86 3.35,40.85 4.45,40.85
P5V0 on L1 "P5V0_L01_P014" (solid, pour order 14): 21.85,39.05 21.84,39.06 21.84,41.31 22.99,41.31 23.2,41.1 23.2,39.3 22.95,39.05
GND on L1 "GND_L01_P013" (solid, pour order 13): 21.56,35.29 21.7,35.43 21.7,37.9 21.8,38 21.8,38.8 21.56,39.04 21.56,41.31 20.94,41.31 20.9,41.27 20.9,39.05 20.6,38.75 20.6,37.9 20.8,37.7 20.8,35.43 20.94,35.29
GND on L1 "GND_L01_P012" (solid, pour order 12): 3.06,37.09 3.2,37.23 3.2,39.7 3.3,39.8 3.3,40.6 3.06,40.84 3.06,43.11 2.44,43.11 2.4,43.07 2.4,40.85 2.1,40.55 2.1,39.7 2.3,39.5 2.3,37.23 2.44,37.09
GND on P2 (split plane): 317 vertices, not listed, extent 0.602,0.602 23.398,75.898

## Keep-outs
KeepOutLayer:
  circle w0.1: c8.59,70.6 r0.7
  circle w0.1: c16.21,69.584 r0.7
  circle w0.1: c16.21,71.616 r0.7
  circle w0.1: c14.305,68.06 r1.421
  circle w0.1: c8.59,68.06 r1.421
  circle w0.1: c14.305,73.14 r1.421
  circle w0.1: c8.59,73.14 r1.421
  lines w0.05: 0,59.3 1.503,59.3 1.503,65 ; 0.9,69.3 0,69.3 ; 1.5,65.6 1.5,68.4 ; 1.5,69.3 0,69.3 ; 0,69.3 0,69.3

## Other copper
L4:
  pour cut-out: 10.925,8.565 10.925,16.625 13.125,16.625 13.125,8.565

## Silkscreen, mask and mechanical layers (free items; w line width, h text height)
TopOverlay:
  lines w0.1: 17,55.8 18.4,57.2 21.7,57.2
  text "ID" at 15.137,64.922 h1.52
  text "3" at 6.954,61.754 h1.52
  text "0" at 15.454,61.754 h1.52
  text "ID1" at 11.7,52.65 h0.6 r90
  text "P12V0" at 17.193,52.593 h0.6 r90
  text "ID3" at 9.29,52.45 h0.6 r90
  text "ID2" at 10.49,52.45 h0.6 r90
  text "ID0" at 13.055,52.45 h0.6 r90
  text "P5V0" at 7.95,51.75 h0.6 r90
  text "STAT" at 14.655,51.05 h0.6 r90
  text "P3V3" at 18.85,41.05 h0.6 r90
  text "RF Detector" at 1.7,34 h1.5
  text "v1.0" at 2.2,31.7 h1.52
Mechanical1:
  lines w0.15: 0,0 24,0 ; 0,0 24,0 ; 0,0 0,43.44 1.5,43.44 1.5,50.413 1.577,50.49 4.377,50.49 4.452,50.428 ccw(c4.377,50.723) 4.681,50.723 ccw(c4.377,50.723) 4.452,51.019 4.377,50.957 1.577,50.957 1.5,51.033 1.5,57.023 1.5,64.913 1.577,64.99 4.377,64.99 4.452,64.928 ccw(c4.377,65.223) 4.681,65.223 ccw(c4.377,65.223) 4.452,65.519 4.377,65.457 1.5,65.457 1.5,72.347 0,72.347 0,76.5 24,76.5 24,72.347 22.5,72.347 22.5,65.457 19.623,65.457 19.548,65.519 ccw(c19.623,65.223) 19.319,65.223 ccw(c19.623,65.223) 19.548,64.928 19.623,64.99 22.423,64.99 22.5,64.913 22.5,57.023 22.5,51.033 22.423,50.957 19.623,50.957 19.548,51.019 ccw(c19.623,50.723) 19.319,50.723 ccw(c19.623,50.723) 19.548,50.428 19.623,50.49 22.423,50.49 22.5,50.413 22.5,43.44 24,43.44 24,0

## Text inside footprints (layer, text, board x,y; h text height)
SW2: TopOverlay "1" at 7.523,60.025 h1